# EAGLE board smartwatch-old (EAGLE 6.5.0)
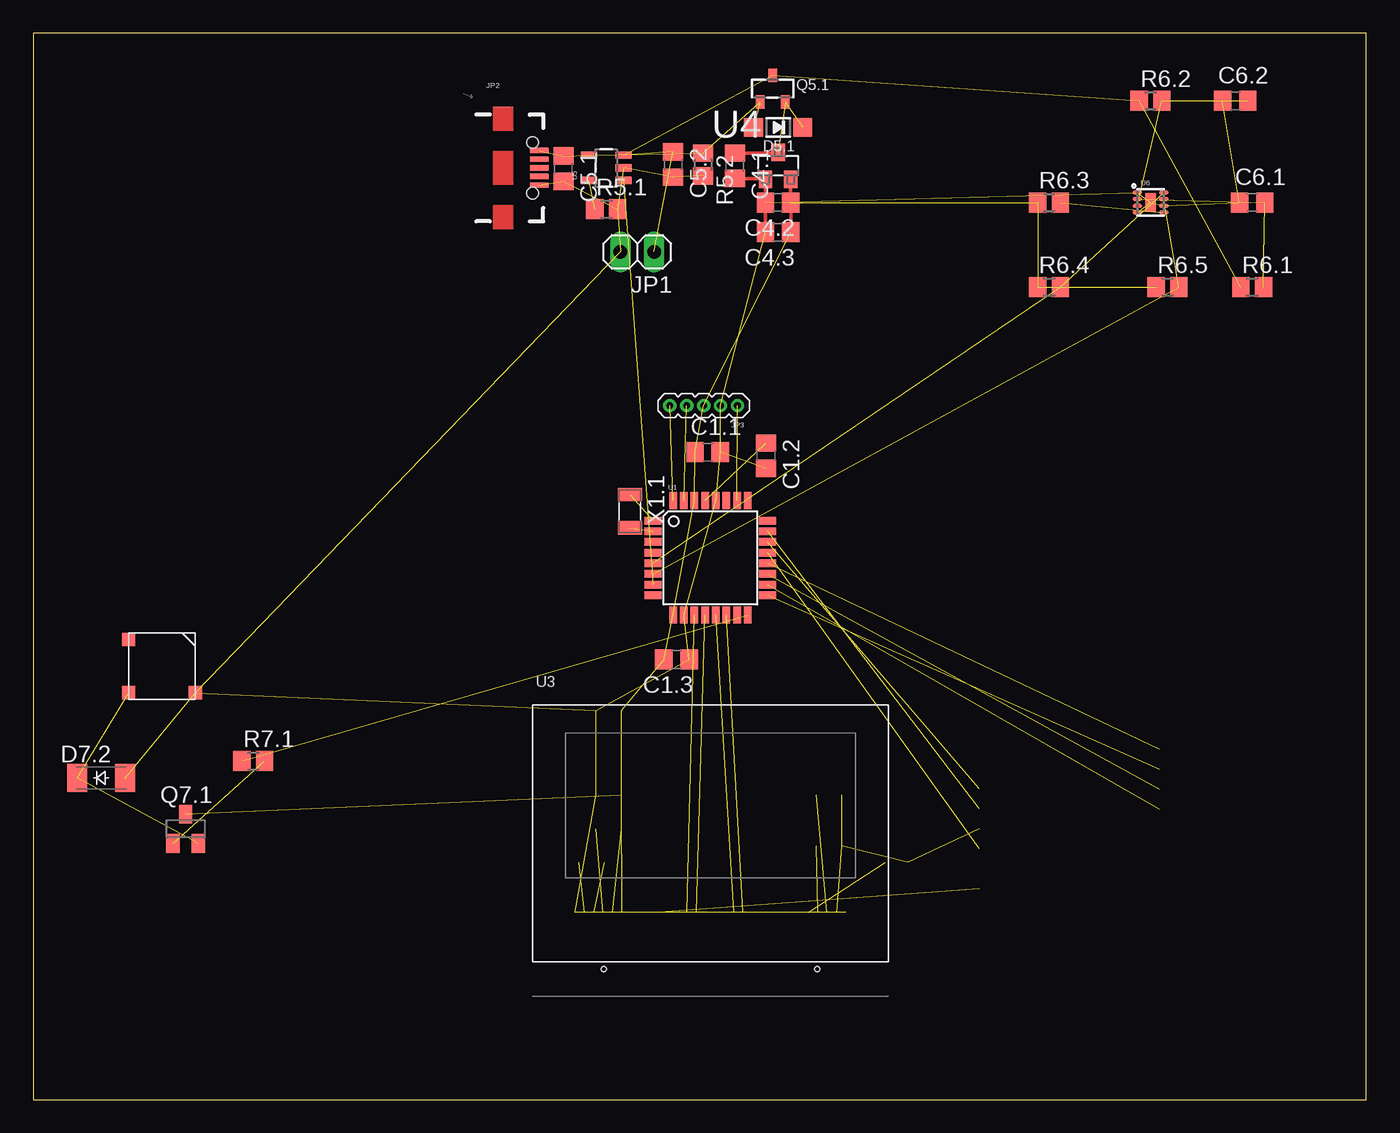
[diagram p0: board, top side]
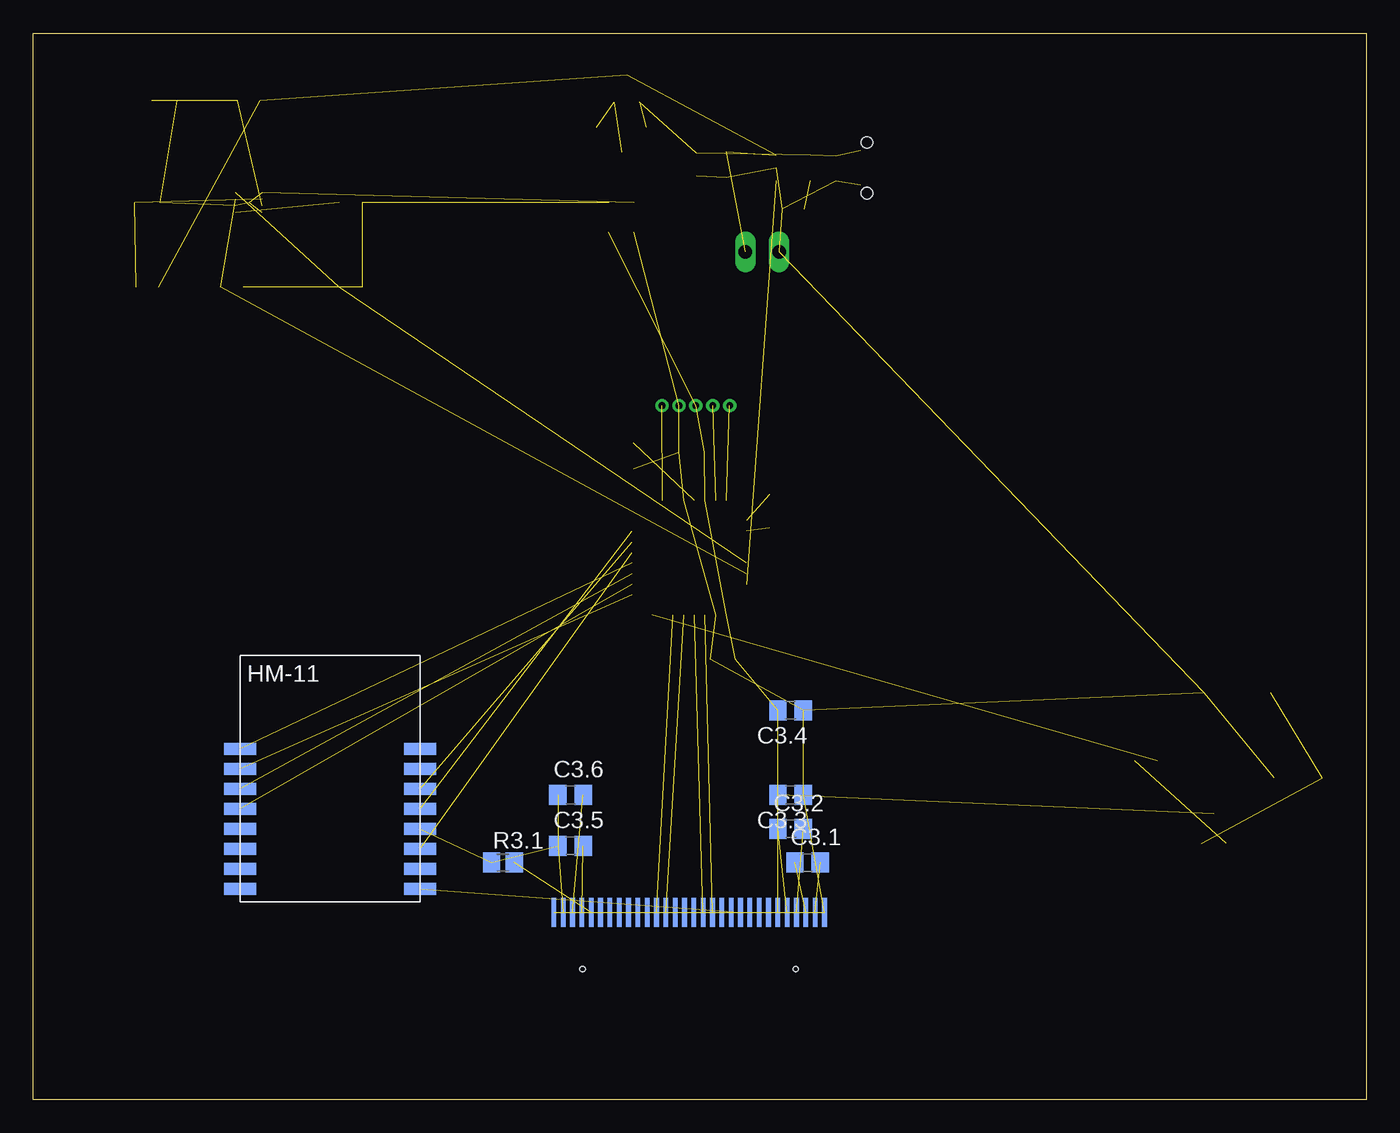
[diagram p1: board, bottom side, seen from below]

Size 100 x 80 mm. Coordinates in mm from the lower left corner, seen from the top.
Outline: 0,0 100,0 100,80 0,80 0,0
Copper layers (1*16): Top 0.0356mm / dielectric 1.5011mm / Bottom 0.0356mm
Design rules "LaenPCBOrder": minimum track width 6mil, minimum drill 13mil, track to track 6mil, track to pad 6mil, pad to pad 6mil, via to via 6mil, smd to smd 6mil, copper to edge 15mil, drill to drill 6mil, minimum pad ring 7mil, minimum via ring 7mil, stop-mask expansion 3mil, vias tented up to drill 0mil, thermal gap 10mil

## Footprints (pad centres in the part's own frame; a part is rotated, then mirrored left to right if it is on the bottom)
C0805 = smd 1.3 x 1.5: 1 -0.95,0; 2 0.95,0
SOD-123 = smd 1.4 x 1.4: A 1.85,0; C -1.85,0
SOD-123_MINI-SMA = smd 1.5 x 2.1: A 1.8,0; C -1.8,0
1X02 = drill 1.016 long: 1 -1.27,0; 2 1.27,0
USB-B-MICRO-SMD_V03 = smd 1.4 x 0.4: D+1 2.7,0; D-1 2.7,0.65; GND1 2.7,-1.3; ID1 2.7,-0.65; VBUS1 2.7,1.3 | hole 0.85: 2.2,1.9; 2.2,-1.9
1X05-1.27MM = drill 0.508 pad 1: 1 0,0; 2 1.27,0; 3 2.54,0; 4 3.81,0; 5 5.08,0
SOT23-R = smd 0.635 x 1.016: 1 -0.95,-1; 2 0.95,-1; 3 0,1
SOT23 = smd 1 x 1.4: 1 -0.95,-1.1; 2 0.95,-1.1; 3 0,1.1
R2012 = smd 1.3 x 1.5: 1 -0.85,0; 2 0.85,0
TQFP32-08 = smd 1.27 x 0.559: 1 -4.293,2.8; 2 -4.293,2; 3 -4.293,1.2; 4 -4.293,0.4; 5 -4.293,-0.4; 6 -4.293,-1.2; 7 -4.293,-2; 8 -4.293,-2.8; 17 4.293,-2.8; 18 4.293,-2; 19 4.293,-1.2; 20 4.293,-0.4; 21 4.293,0.4; 22 4.293,1.2; 23 4.293,2; 24 4.293,2.8 | smd 0.559 x 1.27: 9 -2.8,-4.293; 10 -2,-4.293; 11 -1.2,-4.293; 12 -0.4,-4.293; 13 0.4,-4.293; 14 1.2,-4.293; 15 2,-4.293; 16 2.8,-4.293; 25 2.8,4.293; 26 2,4.293; 27 1.2,4.293; 28 0.4,4.293; 29 -0.4,4.293; 30 -1.2,4.293; 31 -2,4.293; 32 -2.8,4.293
HM-11 = smd 2.4 x 0.9: GND 6.5,0; NC@5 -7,0; NC@6 -7,-1.5; NC@7 -7,-3; NC@8 -7,-4.5; NC@10 6.5,-3; PIO0 6.5,6; PIO1 6.5,4.5; PIO2 6.5,3; PIO3 6.5,1.5; RESETB 6.5,-1.5; UART_CTS -7,3; UART_RTS -7,6; UART_RX -7,1.5; UART_TX -7,4.5; VCC 6.5,-4.5
UG-2864HSWEG01_0.96IN_WRAPAROUND = smd 0.35 x 2.2 bottom: 1 -10.15,-1.2; 2 -9.45,-1.2; 3 -8.75,-1.2; 4 -8.05,-1.2; 5 -7.35,-1.2; 6 -6.65,-1.2; 7 -5.95,-1.2; 8 -5.25,-1.2; 9 -4.55,-1.2; 10 -3.85,-1.2; 11 -3.15,-1.2; 12 -2.45,-1.2; 13 -1.75,-1.2; 14 -1.05,-1.2; 15 -0.35,-1.2; 16 0.35,-1.2; 17 1.05,-1.2; 18 1.75,-1.2; 19 2.45,-1.2; 20 3.15,-1.2; 21 3.85,-1.2; 22 4.55,-1.2; 23 5.25,-1.2; 24 5.95,-1.2; 25 6.65,-1.2; 26 7.35,-1.2; 27 8.05,-1.2; 28 8.75,-1.2; 29 9.45,-1.2; 30 10.15,-1.2 | hole 0.4: -8,-5.45; 8,-5.45
SOT95P237X112-3N = smd 0.991 x 1.321: 1 -0.94,-1.016; 2 0.94,-1.016; 3 0,1.016
SOT23-5 = smd 0.55 x 1.2: 1 -0.95,-1.3; 2 0,-1.3; 3 0.95,-1.3; 4 0.95,1.3; 5 -0.95,1.3
8-TDFN-EP = smd 0.7 x 0.3: 1 -0.99,0.75; 2 -0.99,0.25; 3 -0.99,-0.25; 4 -0.99,-0.75; 5 0.99,-0.75; 6 0.99,-0.25; 7 0.99,0.25; 8 0.99,0.75 | smd 0.8 x 1.38: 9 0,0
KSSG33J12 = smd 1 x 1: GND 2,-2.5; NC -3,1.5; VCC -3,-2.5
FC-135 = smd 1 x 1.8: 1 -1.25,0; 2 1.25,0

## Placement (x,y rotation side)
C1.1  100nF  [C0805]  50.6,48.56 0 top
C1.2  100nF  [C0805]  54.97,48.31 270 top
C1.3  100nF  [C0805]  48.26,33.02 180 top
C3.1  1uF/10V  [C0805]  41.91,17.78 0 bottom
C3.2  1uF/10V  [C0805]  43.18,20.32 0 bottom
C3.3  1uF  [C0805]  43.18,22.86 180 bottom
C3.4  1uF  [C0805]  43.18,29.21 180 bottom
C3.5  2.2uF  [C0805]  59.69,19.05 0 bottom
C3.6  2.2uF  [C0805]  59.69,22.86 0 bottom
C4.1  1uF  [C0805]  52.63,70.05 270 top
C4.2  1uF  [C0805]  55.88,67.31 180 top
C4.3  10uF  [C0805]  55.88,65.07 180 top
C5.1  4.7uF  [C0805]  39.78,69.85 270 top
C5.2  4.7uF  [C0805]  48.01,70.15 270 top
C6.1  10uF  [C0805]  91.44,67.31 0 top
C6.2  10nF  [C0805]  90.17,74.93 0 top
D5.1  B130LAW  [SOD-123]  55.88,72.95 180 top
D7.2  [SOD-123_MINI-SMA]  5.08,24.13 0 top
JP1  [1X02]  45.31,63.6 180 top
JP2  MICRO USB  [USB-B-MICRO-SMD_V03]  35.26,69.9 0 top
JP3  [1X05-1.27MM]  52.83,52.07 180 top
Q5.1  DMP1045U  [SOT23-R]  55.47,75.84 0 top
Q7.1  [SOT23]  11.43,20.32 0 top
R3.1  390K  [R2012]  64.77,17.78 0 bottom
R5.1  10K  [R2012]  42.98,66.8 0 top
R5.2  100K  [R2012]  50.24,70.15 270 top
R6.1  150  [R2012]  91.44,60.96 0 top
R6.2  150  [R2012]  83.82,74.93 0 top
R6.3  4.7K  [R2012]  76.2,67.31 0 top
R6.4  4.7K  [R2012]  76.2,60.96 0 top
R6.5  4.7K  [R2012]  85.09,60.96 0 top
R7.1  1K  [R2012]  16.51,25.4 0 top
U1  [TQFP32-08]  50.8,40.64 0 top
U2  HM-11  [HM-11]  77.47,20.32 0 bottom
U3  [UG-2864HSWEG01_0.96IN_WRAPAROUND]  50.8,15.24 0 top
U4  [SOT95P237X112-3N]  55.88,70.05 0 top
U5  MCP73832  [SOT23-5]  42.98,69.9 90 top
U6  MAX17043  [8-TDFN-EP]  83.82,67.31 0 top
U7  KSSG33J12  [KSSG33J12]  10.16,33.02 0 top
X1.1  FC-135  [FC-135]  44.75,44.15 270 top

## Library data of the parts
C1.1-C1.3 C3.1-C3.6 C4.1-C4.3 C5.1 C5.2 C6.1 C6.2 = rcl
D5.1 = lbrzak
D7.2 = diode
JP1 = pinhead
JP2 = SparkFun-Connectors; PROD_ID: CONN-11752
JP3 = SparkFun-Connectors
Q5.1 = lbrmicrobuilder
Q7.1 = semicon-smd-ipc
R3.1 R5.1 R5.2 R6.1-R6.5 R7.1 = resistor
U1 = samd20
U2 = hm-11
U3 = microbuilder
U4 = mcp1700T-330; MPN: MCP1700T-3302E/TT; OC_FARNELL: 1296592; OC_NEWARK: 88H9817; PACKAGE: SOT23-3; SUPPLIER: Microchip
U5 = SparkFun
U6 = max17043
U7 = kssg33j12
X1.1 = m-pad-2.1

## Nets
ALRT: R6.3.2 U6.5
BUZ: R7.1.1 U1.16
CS: U1.11 U3.13
CTS: U1.20 U2.UART_RTS
GND: C1.1.2 C1.2.2 C1.3.1 C3.3.1 C3.4.1 C3.5.1 C3.6.1 C4.1.2 C4.2.2 C4.3.2 C5.1.2 C5.2.2 C6.1.1 C6.2.1 D7.2.A JP1.2 JP2.GND1 JP3.2 R3.1.1 R5.1.2 R5.2.2 U1.10 U1.28 U2.GND U3.1 U3.8 U3.11 U3.12 U3.29 U3.30 U4.1 U5.2 U6.1 U6.4 U6.6 U6.9 U7.GND
MOSI: U1.14 U3.19
N$1: C3.1.2 U3.2
N$2: C3.1.1 U3.3
N$3: C3.2.2 U3.4
N$4: C3.2.1 U3.5
N$5: R3.1.2 U3.26
N$6: C1.2.1 U1.29
N$7: C3.5.2 U3.27
N$8: C3.6.2 U3.28
N$12: U1.1 X1.1.1
N$13: U1.2 X1.1.2
N$14: D7.2.C Q7.1.2 U7.VCC
N$15: Q7.1.1 R7.1.2
N$17: C6.2.2 R6.2.2 U6.3
N$20: C6.1.2 R6.1.2 U6.2
PIO2: U1.22 U2.PIO2
PIO3: U1.23 U2.PIO3
PROG: R5.1.1 U5.5
RES: U1.12 U3.14
RESET: JP3.1 U1.26
RESETB: U1.21 U2.RESETB
RTS: U1.19 U2.UART_CTS
RX: U1.17 U2.UART_TX
SCK: U1.13 U3.18
SCL: R6.5.2 U1.6 U6.7
SDA: R6.4.2 U1.5 U6.8
STAT: U1.7 U5.1
SWCLK: JP3.4 U1.31
SWDIO: JP3.5 U1.32
TX: U1.18 U2.UART_RX
VBAT: C5.2.1 JP1.1 Q5.1.3 R6.1.1 R6.2.1 U5.3
VCC: C1.1.1 C1.3.2 C3.3.2 C3.4.2 C4.2.1 C4.3.1 JP3.3 Q7.1.3 R6.3.1 R6.4.1 R6.5.1 U1.9 U1.30 U2.VCC U3.6 U3.9 U3.10 U4.2
VIN: C4.1.1 D5.1.C Q5.1.2 U4.3
VUSB: C5.1.1 D5.1.A JP2.VBUS1 Q5.1.1 R5.2.1 U5.4

## Tracks (layer width: path | path; a pad name or v marks a point on that pad's centre or on a via)
ALRT  (1 unrouted)
BUZ  (1 unrouted)
CS  (1 unrouted)
CTS  (1 unrouted)
GND  (33 unrouted)
  Top 0.254: C4.3.2 C4.2.2 U4.1 54.94,69.1 C4.1.2
MOSI  (1 unrouted)
N$1  (1 unrouted)
N$2  (1 unrouted)
N$3  (1 unrouted)
N$4  (1 unrouted)
N$5  (1 unrouted)
N$6  (1 unrouted)
N$7  (1 unrouted)
N$8  (1 unrouted)
N$12  (1 unrouted)
N$13  (1 unrouted)
N$14  (2 unrouted)
N$15  (1 unrouted)
N$17  (2 unrouted)
N$20  (2 unrouted)
PIO2  (1 unrouted)
PIO3  (1 unrouted)
PROG  (1 unrouted)
RES  (1 unrouted)
RESET  (1 unrouted)
RESETB  (1 unrouted)
RTS  (1 unrouted)
RX  (1 unrouted)
SCK  (1 unrouted)
SCL  (2 unrouted)
SDA  (2 unrouted)
STAT  (1 unrouted)
SWCLK  (1 unrouted)
SWDIO  (1 unrouted)
TX  (1 unrouted)
VBAT  (5 unrouted)
VCC  (15 unrouted)
  Top 0.254: C4.3.1 C4.2.1 U4.2
VIN  (2 unrouted)
  Top 0.254: C4.1.1 55.88,71 U4.3
VUSB  (5 unrouted)